# EAGLE board pmod_clock-default.01be7e2c (EAGLE 7.7.0)
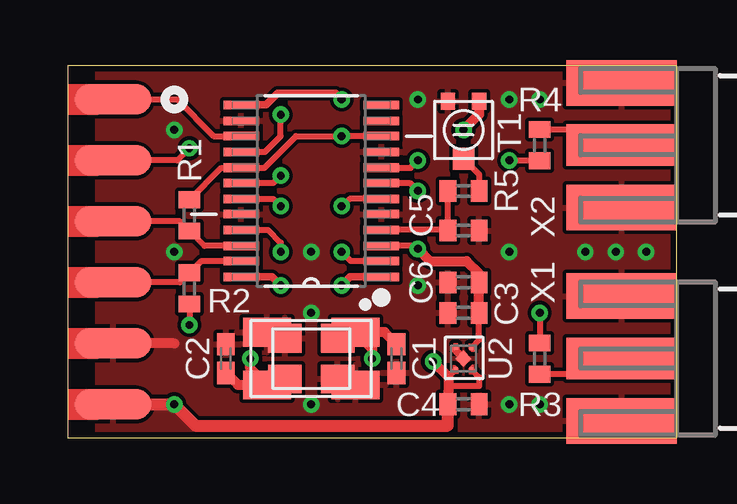
[diagram p0: board, top side]
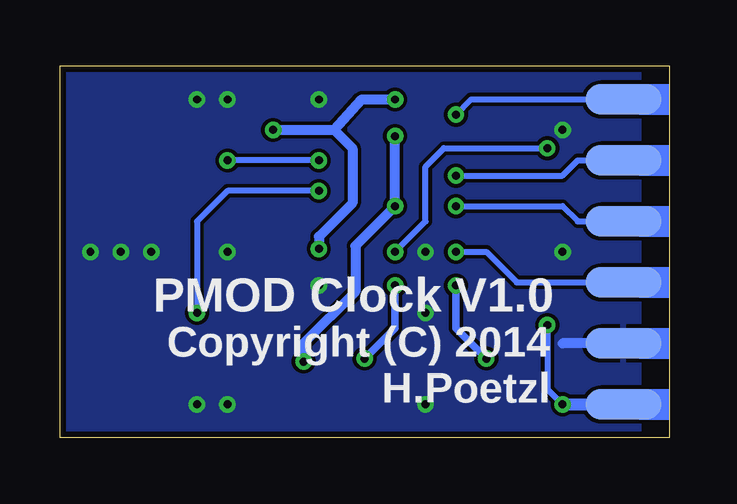
[diagram p1: board, bottom side, seen from below]

Size 25.4 x 15.49 mm. Coordinates in mm from the lower left corner, seen from the top.
Outline: 0,0 25.4,0 25.4,15.49 0,15.49 0,0
Copper layers (1*16): Top 0.0356mm / dielectric 1.5011mm / Bottom 0.0356mm
Design rules "LaenPCBOrder *": minimum track width 6mil, minimum drill 13mil, track to track 6mil, track to pad 6mil, pad to pad 6mil, via to via 6mil, smd to smd 6mil, copper to edge 10mil, drill to drill 6mil, minimum pad ring 7mil, minimum via ring 7mil, stop-mask expansion 4mil, vias tented up to drill 15mil, thermal gap 6mil

## Footprints (pad centres in the part's own frame; a part is rotated, then mirrored left to right if it is on the bottom)
C0402K = smd 0.925 x 0.74: 1 -0.6,0; 2 0.6,0
C0402 = smd 0.7 x 0.9: 1 -0.65,0; 2 0.65,0
SMD1.27-3.175HR = smd 1.27 x 3.175: 1 0,0
MIX = smd 2 x 1.2: 1 -1.85,-1.1; 2 1.85,-1.1; 3 1.85,1.1; 4 -1.85,1.1 | smd 1.4 x 1.2: 1@ -1.1,-0.85; 2@ 1.1,-0.85; 3@ 1.1,0.85; 4@ -1.1,0.85
R0402 = smd 0.7 x 0.9: 1 -0.65,0; 2 0.65,0
TRIM-PVZ2A = smd 0.6 x 0.7: 1 -0.65,-1.2; 3 0.65,-1.2 | smd 0.9 x 0.9: 2 0,1.2
SOP65P640X120-24N = smd 1.473 x 0.356: 1 -2.921,3.581; 2 -2.921,2.921; 3 -2.921,2.286; 4 -2.921,1.626; 5 -2.921,0.965; 6 -2.921,0.33; 7 -2.921,-0.33; 8 -2.921,-0.965; 9 -2.921,-1.626; 10 -2.921,-2.286; 11 -2.921,-2.921; 12 -2.921,-3.581; 13 2.921,-3.581; 14 2.921,-2.921; 15 2.921,-2.286; 16 2.921,-1.626; 17 2.921,-0.965; 18 2.921,-0.33; 19 2.921,0.33; 20 2.921,0.965; 21 2.921,1.626; 22 2.921,2.286; 23 2.921,2.921; 24 2.921,3.581
NXP_LD6805 = smd 0.17 x 0.17: 1 -0.325,-0.45; 2 0.325,-0.45; 3 0.325,0.45; 4 -0.325,0.45 | smd 0.48 x 0.48 rotated 45: 5 0,0
SMA-EDGE = smd 4.6 x 1.73: 1 -2.3,0 | smd 4.6 x 1.9: 2@3 -2.3,-2.6; 2@4 -2.3,2.6

## Placement (x,y rotation side)
C1  10p  [C0402K]  13.72,3.3 270 top
C2  10p  [C0402K]  6.6,3.3 90 top
C3  1µ  [C0402]  16.51,5.21 180 top
C4  1µ  [C0402]  16.51,1.4 0 top
C5  0.1µ  [C0402]  16.51,8.64 0 top
C6  100n  [C0402]  16.51,6.48 180 top
PAD1  [SMD1.27-3.175HR]  1.91,14.1 270 top
PAD2  [SMD1.27-3.175HR]  1.91,11.56 270 top
PAD3  [SMD1.27-3.175HR]  1.91,9.02 270 top
PAD4  [SMD1.27-3.175HR]  1.91,6.48 270 top
PAD5  [SMD1.27-3.175HR]  1.91,3.94 270 top
PAD6  [SMD1.27-3.175HR]  1.91,1.4 270 top
PAD7  [SMD1.27-3.175HR]  1.91,14.1 90 bottom
PAD8  [SMD1.27-3.175HR]  1.91,11.56 90 bottom
PAD9  [SMD1.27-3.175HR]  1.91,9.02 90 bottom
PAD10  [SMD1.27-3.175HR]  1.91,6.48 90 bottom
PAD11  [SMD1.27-3.175HR]  1.91,3.94 90 bottom
PAD12  [SMD1.27-3.175HR]  1.91,1.4 90 bottom
Q1  SMD-4P-2G5.0X3.2+3.2X2.5  [MIX]  10.16,3.3 180 top
R1  4k7  [R0402]  5.08,9.27 90 top
R2  4k7  [R0402]  5.08,6.22 270 top
R3  22R  [R0402]  19.68,3.3 90 top
R4  22R  [R0402]  19.68,12.19 270 top
R5  100k  [R0402]  16.51,10.29 180 top
T1  PVZ2A  [TRIM-PVZ2A]  16.51,12.83 180 top
U1  CDCE949PW  [SOP65P640X120-24N]  10.16,10.29 180 top
U2  LD6805K18H  [NXP_LD6805]  16.51,3.3 180 top
X1  BU-SMA-E  [SMA-EDGE]  25.4,3.3 0 top
X2  BU-SMA-E  [SMA-EDGE]  25.4,12.19 0 top

## Library data of the parts
C1-C6 R1-R5 = rcl
PAD1-PAD12 = wirepad
Q1 = xtal
T1 = paul
U1 = cdce949; FARNELLORDERCODE: 1494886; MPN: CDCE949PW; NEWARKORDERCODE: 50M8835; PACKAGE: TSSOP-24; SUPPLIER: Texas Instruments
U2 = ld6805k; MPN: LD6805K/18H; OC_FARNELL: 2095513; OC_NEWARK: 93T1635; PACKAGE: DFN1010C-4; SUPPLIER: NXP
X1 X2 = sma

## Nets
+1V8: C3.1 C6.1 T1.1 U1.3 U1.13 U2.1
+3V3: C4.1 PAD6.1 PAD12.1 R1.2 R2.2 U1.6 U1.10 U1.17 U2.3 U2.4
GND: C1.2 C2.2 C3.2 C4.2 C5.2 C6.2 PAD5.1 PAD11.1 Q1.2 Q1.2@ Q1.4 Q1.4@ T1.3 U1.5 U1.9 U1.14 U1.20 U2.2 U2.5 X1.2@3 X1.2@4 X2.2@3 X2.2@4
N$1: C1.1 Q1.1 Q1.1@ U1.1
N$4: C2.1 Q1.3 Q1.3@ U1.24
N$5: R4.1 X2.1
N$6: R3.1 X1.1
N$7: R5.1 T1.2
N$12: R3.2 U1.7
S0: PAD2.1 U1.2
S1: PAD4.1 R2.1 U1.23
S2: PAD3.1 R1.1 U1.22
VCNTR: C5.1 R5.2 U1.4
Y1: PAD10.1 U1.21
Y2: PAD9.1 U1.19
Y3: PAD8.1 U1.18
Y5: R4.2 U1.8
Y6: PAD7.1 U1.16
Y7: PAD1.1 U1.15
Y8: U1.11
Y9: U1.12

## Tracks (layer width: path | path; a pad name or v marks a point on that pad's centre or on a via)
+1V8  (via drill 0.33)
  Top 0.254: U2.1 17.16,4.08 C3.1 | v14.61,7.87 14.48,8 U1.3
  Top 0.305: v11.43,14.1 11.18,14.35 8.76,14.35 8.28,13.87 U1.13
  Top 0.406: T1.1 17.16,13.48 v16.51,12.83 | v14.61,7.87 15.11,7.37 16.64,7.37 17.14,6.86 17.14,6.49 C6.1 17.16,5.24 17.14,5.22
  Top 0.508: 17.14,5.22 C3.1
  Bottom 0.406: v16.51,12.83 13.97,12.83 | 13.97,12.83 13.21,12.07 13.21,9.78 14.61,8.38 v14.61,7.87 | 13.97,12.83 12.83,14.1 v11.43,14.1
+3V3  (via drill 0.33)
  Top 0.254: U2.4 17.16,2.53 17.16,2.16 15.88,2.16 | U2.3 15.88,2.54 15.88,2.16 | R1.2 6.41,11.25 U1.17 8.2,11.25 9.53,12.57 v11.43,12.57 U1.10 | U1.6 11.76,9.96 v11.43,9.65 | R2.2 v5.08,4.7 | C4.1 15.88,1.4 15.88,1.91 15.88,2.16
  Top 0.406: v15.24,3.17 15.88,2.54 15.88,1.91
  Top 0.508: PAD12.1 v4.45,1.4 5.33,0.51 15.86,0.51 C4.1
  Bottom 0.254: v5.08,4.7 5.08,2.03 v4.45,1.4
  Bottom 0.406: v11.43,12.57 v11.43,9.65 13.08,8 13.08,6.1 15.24,3.94 v15.24,3.17
  Bottom 0.508: v4.45,1.4 PAD12.1
  pour Top: 1.27,0.13 1.27,1.4 4.45,1.4 5.71,0.13
GND  (via drill 0.33)
  Top 0.305: U2.5 16.18,3.63 U2.2
  Top 0.406: 4.45,3.94 PAD11.1
  Bottom 0.406: PAD11.1 4.45,3.94
  other vias: 4.45,12.83 4.45,7.75 10.16,1.4 18.41,1.4 24.13,7.75 22.86,7.75 21.59,7.75 14.61,14.1 10.16,7.75 10.16,5.21 18.41,14.1 18.41,7.75 14.61,6.35 19.68,1.4 19.68,14.1
  pour Top: 1.27,15.37 25.4,15.37 25.4,0.13 5.71,0.13 4.45,1.4 1.27,1.4
  pour Bottom: 1.27,15.37 25.4,15.37 25.4,0.13 1.27,0.13
N$1  (via drill 0.33)
  Top 0.305: U1.1 11.79,6.71 v11.43,6.35
  Top 0.406: C1.1 13.22,4.4 Q1.1 | Q1.1 12.7,3.71 v12.7,3.3 | Q1.1@ 11.51,4.4 Q1.1
  Bottom 0.305: v11.43,6.35 11.43,4.57 v12.7,3.3
N$4  (via drill 0.33)
  Top 0.305: U1.24 8.53,6.71 v8.89,6.35
  Top 0.406: C2.1 7.1,2.2 Q1.3 | Q1.3 7.62,2.89 v7.62,3.3 | Q1.3@ 8.81,2.2 Q1.3
  Bottom 0.305: v8.89,6.35 8.89,4.57 v7.62,3.3
N$5
  Top 0.254: X2.1 22.45,12.84 R4.1
N$6
  Top 0.254: X1.1 22.45,2.65 R3.1
N$7
  Top 0.254: T1.2 17.16,10.98 R5.1
N$12  (via drill 0.33)
  Top 0.254: U1.7 14.28,10.62 v14.61,10.29 | v19.68,5.21 R3.2
  Bottom 0.254: v14.61,10.29 18.41,10.29 19.68,9.02 v19.68,5.21
S0  (via drill 0.33)
  Top 0.254: U1.2 11.81,7.37 v11.43,7.75 | v5.08,12.07 4.57,11.56 PAD2.1
  Bottom 0.254: v11.43,7.75 10.16,9.02 10.16,11.3 9.4,12.07 v5.08,12.07
S1
  Top 0.254: U1.23 5.57,7.37 R2.1 4.68,6.48 PAD4.1
S2
  Top 0.254: U1.22 5.7,8 R1.1 4.68,9.02 PAD3.1
VCNTR
  Top 0.254: R5.2 C5.1 15.63,8.66 U1.4
Y1  (via drill 0.33)
  Top 0.254: U1.21 8.36,8.66 8.89,8.13 v8.89,7.75
  Bottom 0.254: v8.89,7.75 7.62,7.75 6.35,6.48 PAD10.1
Y2  (via drill 0.33)
  Top 0.254: U1.19 8.59,9.96 v8.89,9.65
  Bottom 0.254: v8.89,9.65 4.45,9.65 3.81,9.02 PAD9.1
Y3  (via drill 0.33)
  Top 0.254: U1.18 8.59,10.62 v8.89,10.92
  Bottom 0.254: v8.89,10.92 4.45,10.92 3.81,11.56 PAD8.1
Y5  (via drill 0.33)
  Top 0.254: U1.8 14.3,11.25 v14.61,11.56 | v18.41,11.56 19.67,11.56 R4.2
  Bottom 0.254: v14.61,11.56 v18.41,11.56
Y6  (via drill 0.33)
  Top 0.254: U1.16 8.23,11.91 8.89,12.57 v8.89,13.46
  Bottom 0.254: v8.89,13.46 8.26,14.1 PAD7.1
Y7
  Top 0.254: PAD1.1 4.57,14.1 6.1,12.57 U1.15

## Text on the board
bPlace: PMOD Clock V1.0 | Copyright (C) 2014 / H.Poetzl